# Altium PCB LEDRing.PcbDoc
Units mil, origin at the board's own origin, x right, y up, seen from the top; angles counter-clockwise.
Board outline 6000 x 4000 mil, 2 copper layers (Top Layer, Bottom Layer); 16 components, 17 nets, 64 pads, 0 vias.
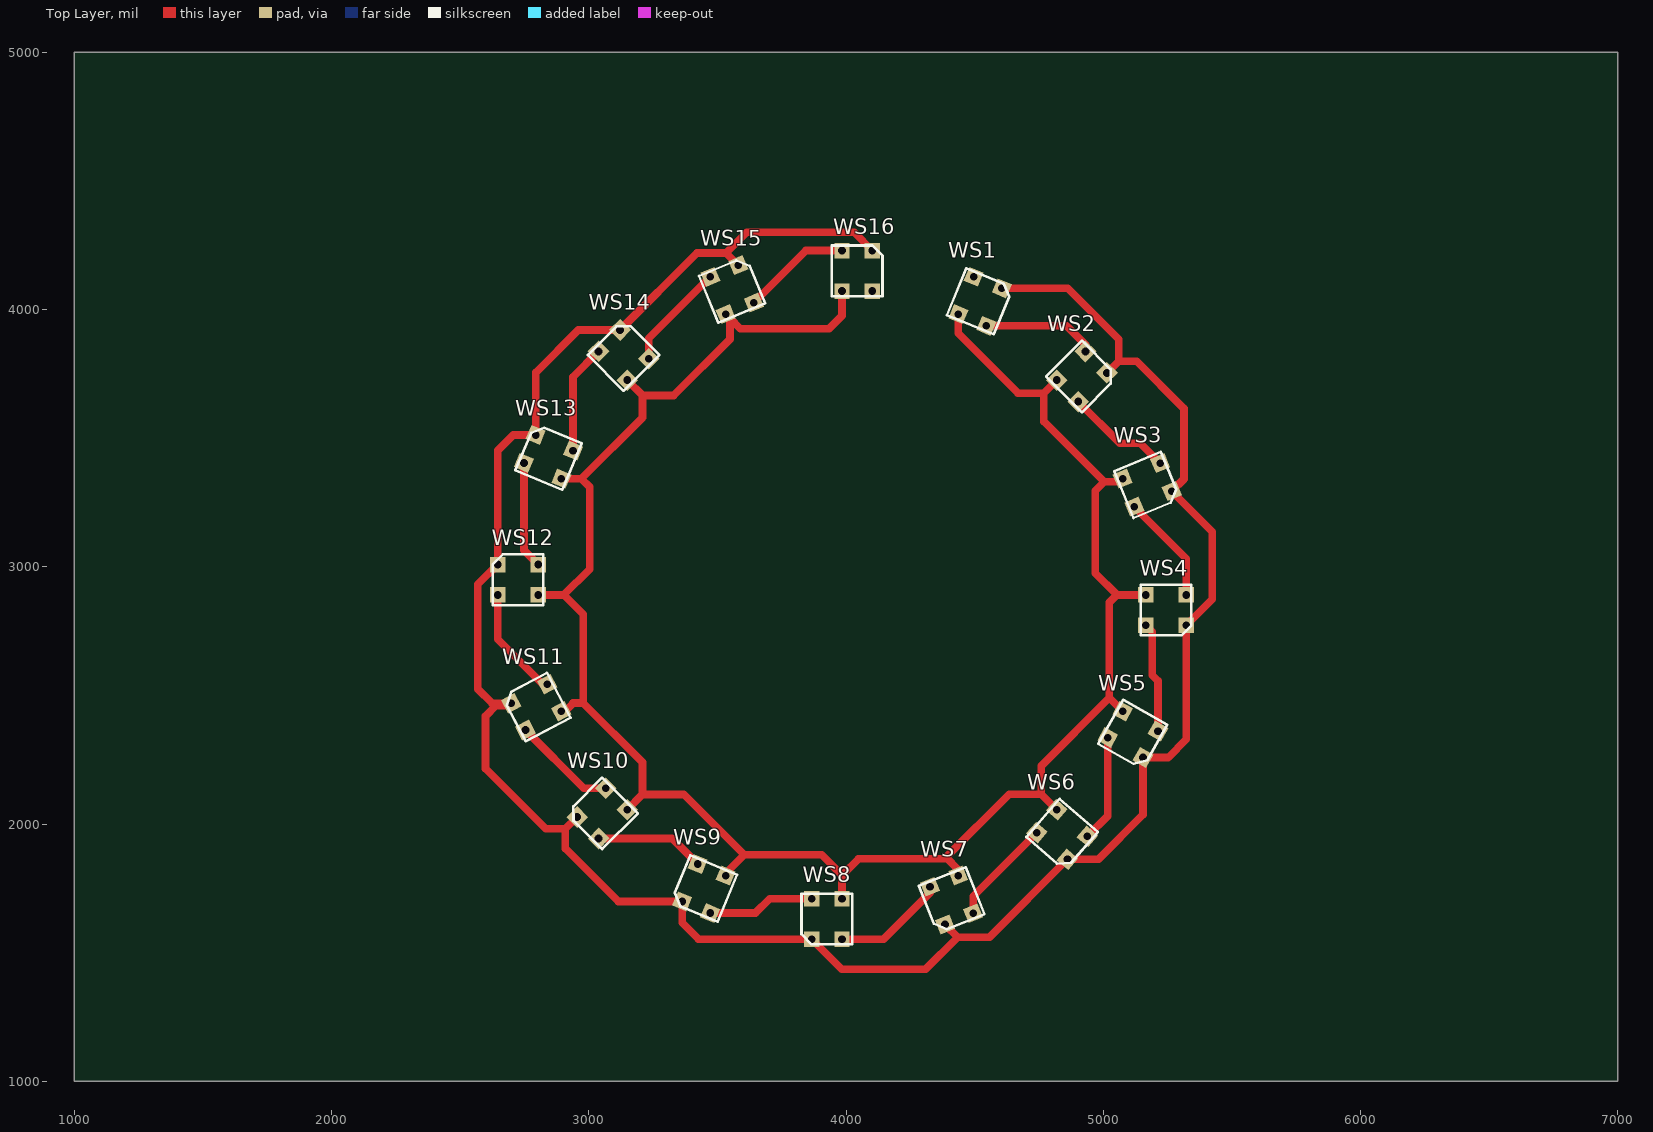
[diagram p0: Top Layer view]
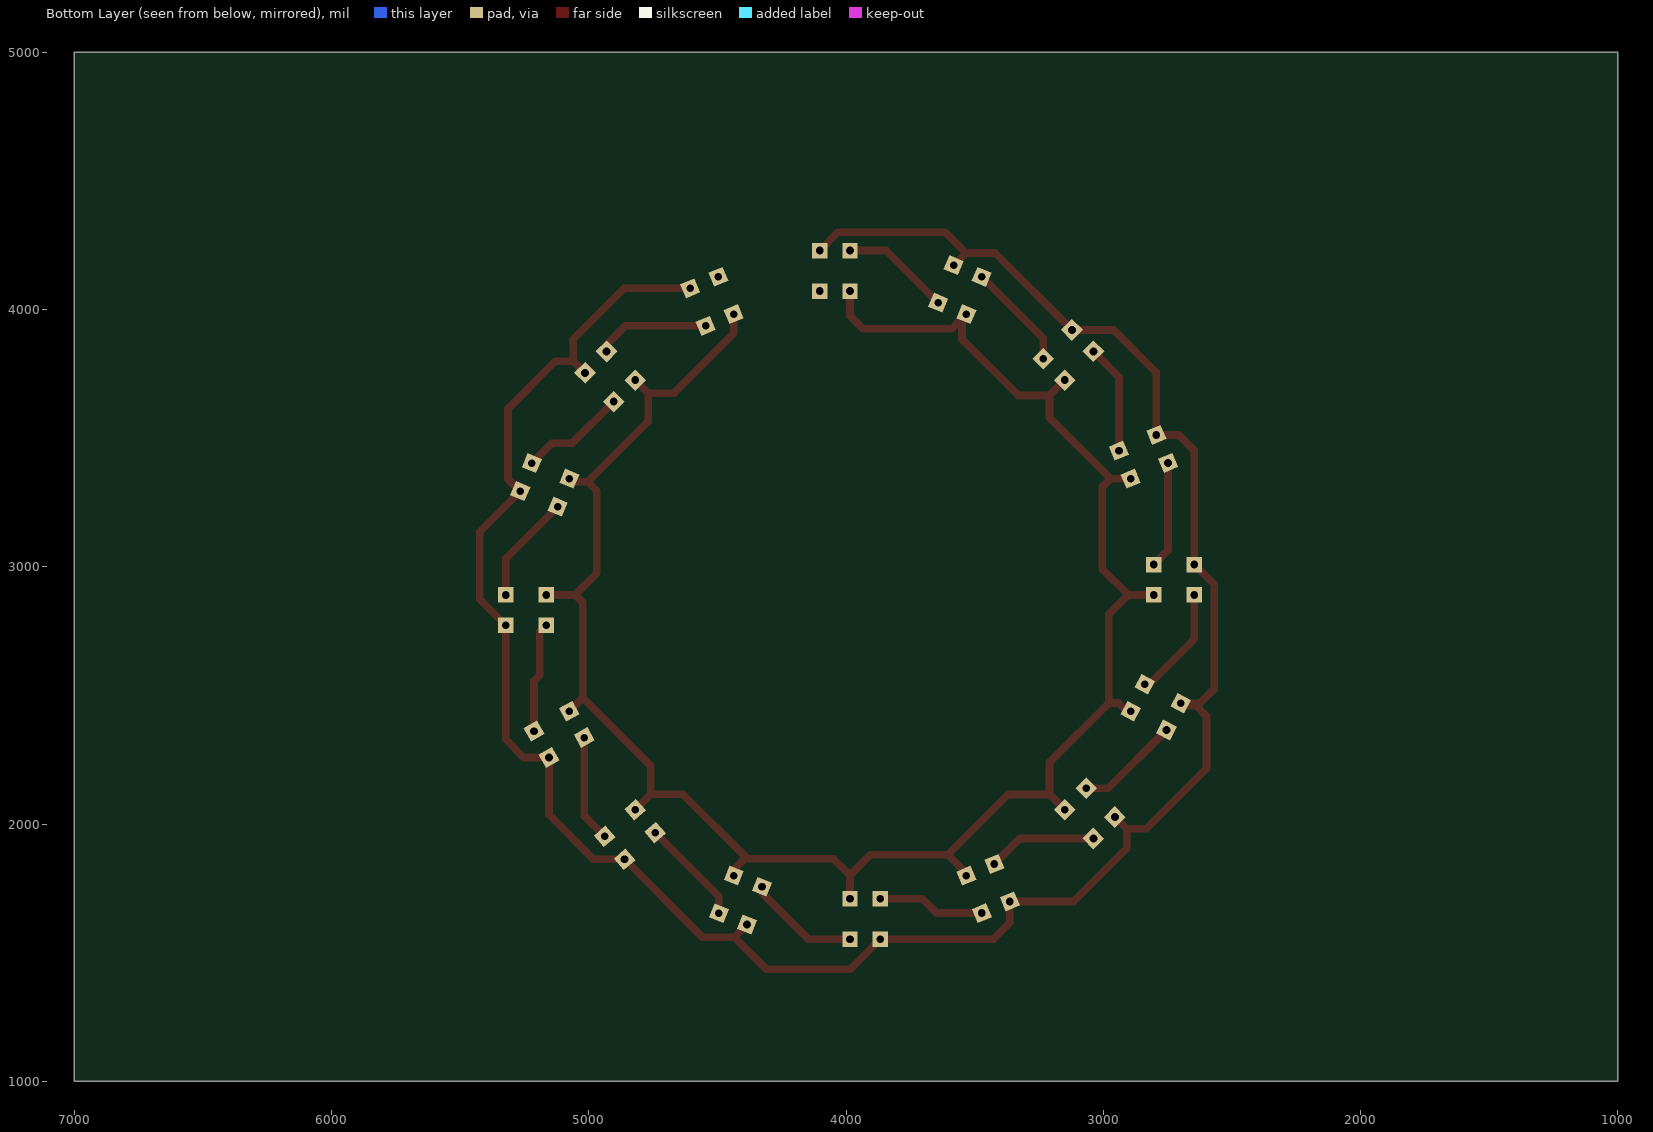
[diagram p1: Bottom Layer view, seen from below]

## Layer stack, top to bottom
Top Solder: solder mask 0.4, Solder Resist, Dk 3.5
Top Layer: signal copper 1.4
Dielectric 1: dielectric 12.6, FR-4, Dk 4.8
Bottom Layer: signal copper 1.4
Bottom Solder: solder mask 0.4, Solder Resist, Dk 3.5

## Board outline
1000,1000 7000,1000 7000,5000 1000,5000

## Design rules (kind name [scope] priority, off if disabled: settings)
Clearance [All] p1: gap=10 ignorepadtopadclearanceinfootprint=FALSE except(0: Arc-Hole Track-Hole SMDPad-Hole THPad-Hole Via-Hole Fill-Hole Poly-Hole Region-Hole Text-Hole)
PolygonConnect [All] p1: connectstyle=Relief reliefconductorwidth=10 reliefentries=4 polygonreliefangle="90 Angle" airgapwidth=10
RoutingVias [All] p1: holewidth=28 width=50 viastyle="Through Hole" minholewidth=28 minwidth=50 maxholewidth=28 maxwidth=50
SolderMaskExpansion [All] p1: expansion=4
Width [All] p1: maxlimit=40 minlimit=10 preferedwidth=10
30 further rules are at their usual default settings.

## Components (designator, comment, footprint, x,y, rotation, side; value= is the part's Value field where it differs from the comment)
WS1 "WS2812B" WS2812B 4436.45,3981.73 r337.68 top
WS2 "WS2812B" WS2812B 4819.63,3725.7 r315 top
WS3 "WS2812B" WS2812B 5075.66,3342.52 r292.5 top
WS4 "WS2812B" WS2812B 5165.57,2890.53 r270 top
WS5 "WS2812B" WS2812B 5075.66,2438.55 r240.44 top
WS6 "WS2812B" WS2812B 4819.63,2055.37 r228.92 top
WS7 "WS2812B" WS2812B 4436.45,1799.34 r201.6 top
WS8 "WS2812B" WS2812B 3984.47,1709.43 r180 top
WS9 "WS2812B" WS2812B 3532.48,1799.34 r157.5 top
WS10 "WS2812B" WS2812B 3149.3,2055.37 r135.15 top
WS11 "WS2812B" WS2812B 2893.27,2438.55 r117.72 top
WS12 "WS2812B" WS2812B 2803.36,2890.53 r90 top
WS13 "WS2812B" WS2812B 2893.27,3342.52 r67.22 top
WS14 "WS2812B" WS2812B 3149.3,3725.7 r44.95 top
WS15 "WS2812B" WS2812B 3532.48,3981.73 r22.44 top
WS16 "WS2812B" WS2812B 3984.47,4071.64 r0 top

## Footprints (in the part's own frame and the unit in brackets; to place one, negate y for a bottom-side part, rotate by r counter-clockwise, add the part's x,y. Pads: shape width x height; smd on the part's side, far side on the other; paste and mask are expansions set on the pad)
WS2812B [mil]
  rect 60x60 hole 30: 1(0,0) 2(118.11,0) 3(118.11,157.48) 4(0,157.48)
  silkscreen extent -39,-20 157,177

## Part data
WS1 WS2 WS3 WS4 WS5 WS6 WS7 WS8 WS9 WS10 WS11 WS12 WS13 WS14 WS15 WS16: library part Component_1

## Nets (pads, with @x,y where several pads share a name; then routed paths per layer and width w, separated by ;. In a path a pad name is that pad's centre, name@x,y a point inside that pad or via, vN(x,y) a via of type N, cw(c..) or ccw(c..) an arc to the next point about the centre after c; other vN are vias at no path point)
GND: WS1.3 WS2.3 WS3.3 WS4.3 WS5.3 WS6.3 WS7.3 WS8.3 WS9.3 WS10.3 WS11.3 WS12.3 WS13.3 WS14.3 WS15.3 WS16.3 | length 9691.6
  Top Layer w30: WS10.3 2908.93,1981.43 ; WS15.3 3538.93,4214.97 3538.93,4225.03 ; WS16.3 4031.69,4300 3613.9,4300 3538.93,4225.03 ; WS7.3 4434.05,1560 ; WS1.3 4861.36,4082.57 5059.95,3883.98 5059.95,3798.98 ; WS2.3 5059.95,3798.98 ; 2908.93,1981.43 2908.93,1905 3114.89,1699.04 WS9.3 3363.09,1615.84 3426.98,1551.95 WS8.3 3983.31,1435 4309.05,1435 4434.05,1560 ; 2908.93,1981.43 2832.5,1981.43 2598.93,2215 2598.93,2420 2638.93,2460 2689.07,2460 WS11.3 2624.08,2469.85 2568.93,2525 2568.93,2931.69 WS12.3 2645.88,3451.95 2706.32,3512.39 WS13.3 2793.8,3754.86 2959.53,3920.59 WS14.3 3421.03,4220 3533.9,4220 3538.93,4225.03 ; 4434.05,1560 4557.88,1560 WS6.3 4981.79,1862.86 5154.38,2035.45 WS5.3 5252.05,2258.12 5323.05,2329.12 WS4.3 5423.93,2873.31 5423.93,3136.09 WS3.3 5313.93,3341.25 5313.93,3615 5129.95,3798.98 5059.95,3798.98
NetWS1_2: WS1.2 WS2.4 | length 441.8
  Top Layer w30: WS1.2 4857.05,3936.88 4930.99,3862.95 WS2.4
NetWS2_2: WS2.2 WS3.4 | length 417.2
  Top Layer w30: WS2.2 5065.33,3480 5143.94,3480 WS3.4
NetWS3_2: WS3.2 WS4.4 | length 426.6
  Top Layer w30: WS3.2 5323.05,3031.21 WS4.4
NetWS4_2: WS4.2 WS5.4 | length 431.1
  Top Layer w30: WS4.2 5190.57,2747.42 5190.57,2578.52 5212.65,2556.44 WS5.4
NetWS5_2: WS5.2 WS6.4 | length 416.7
  Top Layer w30: WS6.4 5017.4,2030.94 WS5.2
NetWS6_2: WS6.2 WS7.4 | length 416
  Top Layer w30: WS7.4 4494.43,1718.74 WS6.2
NetWS7_2: WS7.2 WS8.4 | length 440.2
  Top Layer w30: WS8.4 4145.88,1551.95 4326.64,1732.71 WS7.2
NetWS8_2: WS8.2 WS9.4 | length 417.2
  Top Layer w30: WS9.4 3647.78,1653.85 3703.36,1709.43 WS8.2
NetWS9_2: WS9.2 WS10.4 | length 426.2
  Top Layer w30: WS10.4 3324.18,1943.71 WS9.2
NetWS10_2: WS10.2 WS11.4 | length 405.6
  Top Layer w30: WS11.4 2980.5,2138.66 WS10.2
NetWS11_2: WS11.2 WS12.4 | length 437.4
  Top Layer w30: WS12.4 2645.88,2718.05 2820.83,2543.1 WS11.2
NetWS12_2: WS12.2 WS13.4 | length 417.7
  Top Layer w30: WS13.4 2748.07,3063.94 WS12.2
NetWS13_2: WS13.2 WS14.4 | length 426.8
  Top Layer w30: WS13.2 2939,3738.1 WS14.4
NetWS14_2: WS14.2 WS15.4 | length 417.3
  Top Layer w30: WS14.2 3232.89,3887.81 WS15.4
NetWS15_2: WS15.2 WS16.4 | length 426.6
  Top Layer w30: WS15.2 3843.94,4229.12 WS16.4
VCC: WS1.1 WS2.1 WS3.1 WS4.1 WS5.1 WS6.1 WS7.1 WS8.1 WS9.1 WS10.1 WS11.1 WS12.1 WS13.1 WS14.1 WS15.1 WS16.1 | length 8233.3
  Top Layer w10: WS11.1 WS11.1@2907.48,2438.55 ; WS9.1 WS9.1@3532.48,1808.55
  Top Layer w30: WS12.1 2903.4,2890.53 ; WS13.1 2971.41,3342.52 ; WS11.1@2907.48,2438.55 2938.93,2470 2978.93,2470 ; WS10.1 3208.93,2115 ; WS14.1 3208.93,3666.07 ; WS9.1@3532.48,1808.55 3603.93,1880 ; WS15.1 WS15.1@3548.93,3965.28 ; WS8.1 3984.47,1800.53 ; WS16.1 3984.47,3975.53 3933.93,3925 3589.21,3925 WS15.1@3548.93,3965.28 ; WS7.1 4436.45,1822.48 4388.93,1870 ; WS1.1 4436.45,3907.48 4668.93,3675 4768.93,3675 ; WS6.1 4758.93,2116.07 ; WS2.1 4768.93,3675 ; WS5.1 5023.93,2490.28 ; WS3.1 5063.14,3330 5003.93,3330 ; WS4.1 5053.4,2890.53 ; 2903.4,2890.53 3003.93,2991.07 3003.93,3310 2971.41,3342.52 ; 2903.4,2890.53 2978.93,2815 2978.93,2470 ; 2971.41,3342.52 3208.93,3580.04 3208.93,3666.07 ; 2978.93,2470 3208.93,2240 3208.93,2115 ; 3208.93,2115 3368.93,2115 3603.93,1880 ; 3208.93,3666.07 3330,3666.07 3548.93,3885 WS15.1@3548.93,3965.28 ; 3603.93,1880 3905,1880 3984.47,1800.53 ; 3984.47,1800.53 4048.93,1865 4383.93,1865 4388.93,1870 ; 4388.93,1870 4635,2116.07 4758.93,2116.07 ; 4758.93,2116.07 4758.93,2225.28 5023.93,2490.28 ; 4768.93,3675 4768.93,3565 5003.93,3330 ; 5003.93,3330 4968.93,3295 4968.93,2975 5053.4,2890.53 ; 5023.93,2490.28 5023.93,2861.07 5053.4,2890.53
pads on no net: WS1.4 WS16.2